# Altium PCB Transceiver.PcbDoc (part 2 of 2)
Units mm, origin at the board's own origin, x right, y up, seen from the top; angles counter-clockwise.
Board outline 140 x 70 mm, 2 copper layers (Top Layer, Bottom Layer); 116 components, 126 nets, 485 pads, 156 vias.
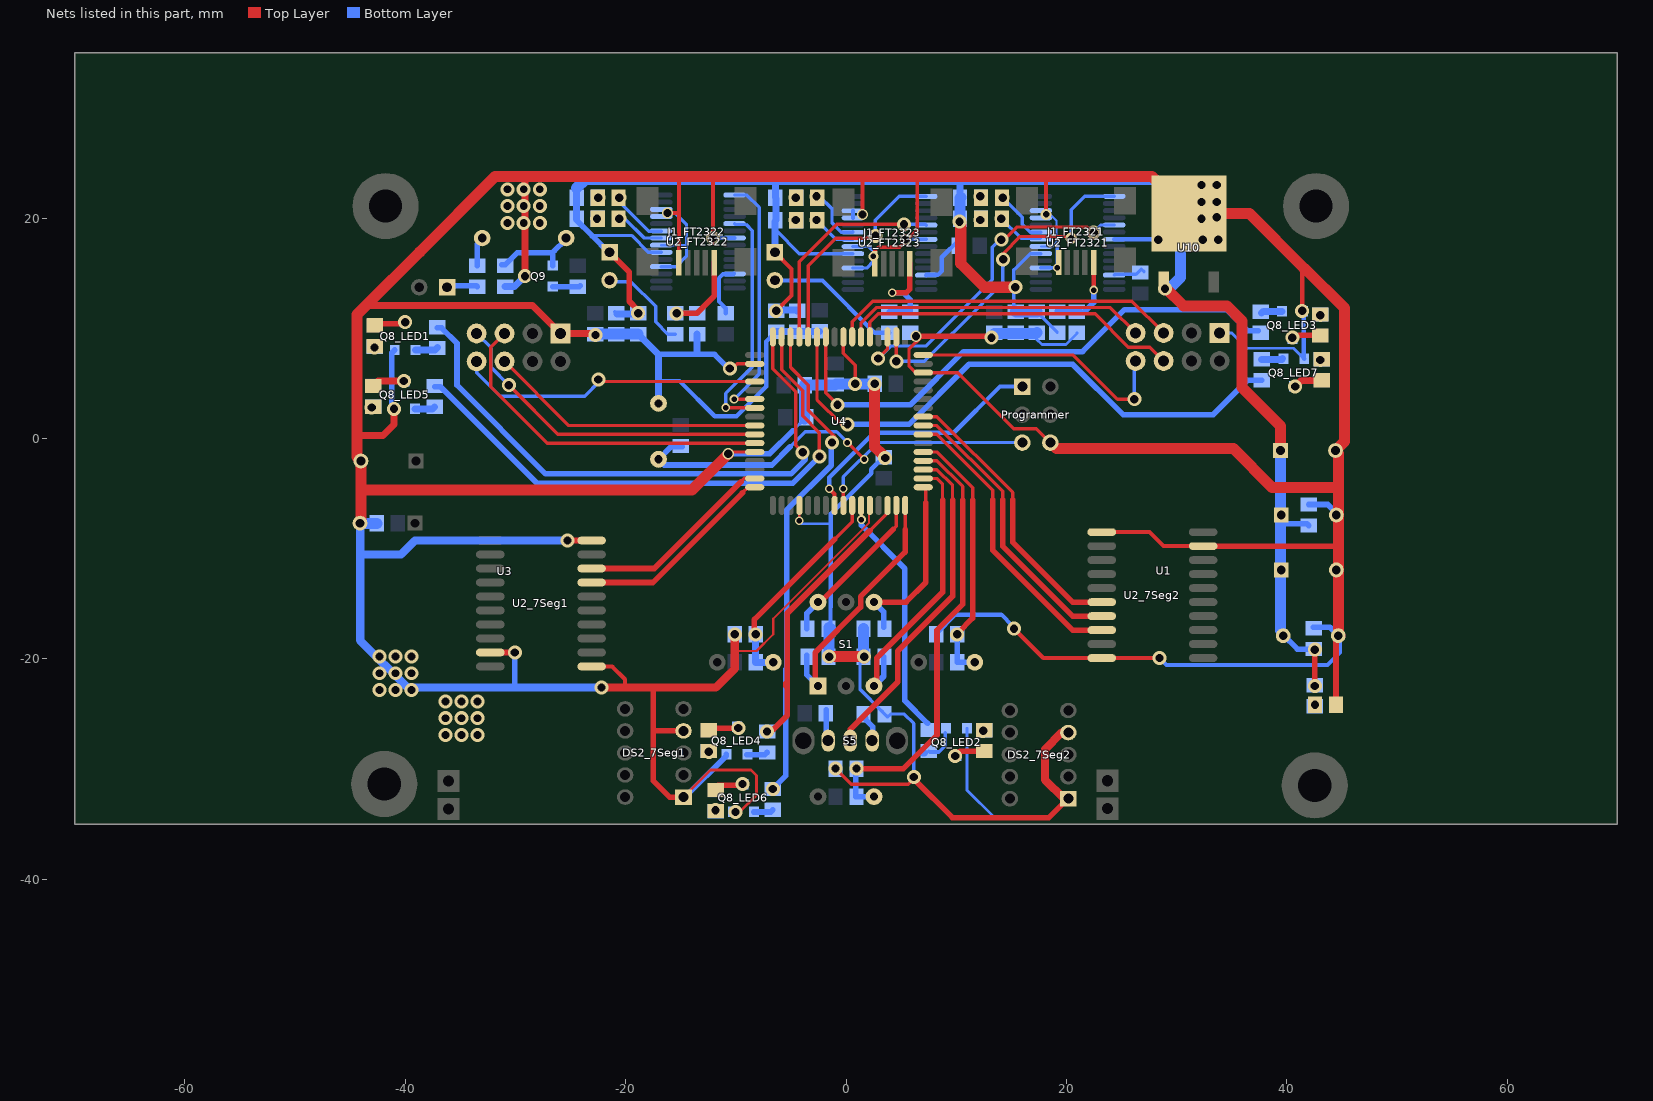
[diagram p2: the nets of this part, all layers, seen from the top]

## Via types
v1: diameter 1.27, hole 0.75, Top Layer to Bottom Layer, 103 vias
v2: diameter 1.27, hole 0.711, Top Layer to Bottom Layer, 27 vias
v3: diameter 0.8, hole 0.5, Top Layer to Bottom Layer, 14 vias
v4: diameter 1.016, hole 0.75, Top Layer to Bottom Layer, 5 vias
v5: diameter 0.762, hole 0.5, Top Layer to Bottom Layer, 2 vias
v6: diameter 1.016, hole 0.6, Top Layer to Bottom Layer, 2 vias
v7: diameter 0.85, hole 0.5, Top Layer to Bottom Layer, 1 vias
v8: diameter 1.27, hole 0.8, Top Layer to Bottom Layer, 1 vias
v9: diameter 0.889, hole 0.5, Top Layer to Bottom Layer, 1 vias

## Nets (pads, with @x,y where several pads share a name; then routed paths per layer and width w, separated by ;. In a path a pad name is that pad's centre, name@x,y a point inside that pad or via, vN(x,y) a via of type N, cw(c..) or ccw(c..) an arc to the next point about the centre after c; other vN are vias at no path point) (continued)
E2: U2_7Seg2.6 U4.9 | length 25.8
  Top Layer w0.3: U4.9@7.015,1.965 8.255,1.965 15.131,-4.911 15.131,-5.59
  Top Layer w0.5: 15.131,-5.59 15.131,-9.416 20.574,-14.859 U2_7Seg2.6@23.213,-14.859
F1: U2_7Seg1.8 U4.47 | length 18.3
  Top Layer w0.305: -9.525,-3.937 -9.223,-3.635 U4.47@-8.285,-3.635
  Top Layer w0.508: U2_7Seg1.8@-23.241,-11.811 U2_7Seg1.8@-23.086,-11.811 -17.399,-11.811 -9.525,-3.937
F2: U2_7Seg2.8 U4.7 | length 26.7
  Top Layer w0.3: U4.7@7.015,0.365 8.255,0.365 13.312,-4.692
  Top Layer w0.305: 13.312,-5.588 13.312,-4.692
  Top Layer w0.5: 13.312,-5.588 13.312,-10.137 20.574,-17.399 U2_7Seg2.8@23.213,-17.399
G1: U2_7Seg1.7 U4.48 | length 18.7
  Top Layer w0.305: -9.398,-4.953 -8.88,-4.435 U4.48@-8.285,-4.435
  Top Layer w0.508: U2_7Seg1.7@-23.368,-13.081 U2_7Seg1.7@-23.086,-13.081 -17.526,-13.081 -9.398,-4.953
G2: U2_7Seg2.7 U4.8 | length 26.3
  Top Layer w0.3: U4.8@7.015,1.165 8.255,1.165 14.222,-4.802 14.222,-5.59
  Top Layer w0.5: 14.222,-5.59 14.222,-9.777 20.574,-16.129 U2_7Seg2.7@23.213,-16.129
GND: C1_FT2321.1 C1_FT2322.1 C1_FT2323.1 C2_FT2321.1 C2_FT2322.1 C2_FT2323.1 C3_FT2321.2 C3_FT2322.2 C3_FT2323.2 C4_FT2321.1 C4_FT2322.1 C4_FT2323.1 C7.2 C9.2 C10.1 C11.2 C12.1 C13.2 C14.1 C15.2 C16.2 C17.1 C18.1 C19.1 C20.1 C21.1 C22.2 D4.2 DS2_7Seg1.1 DS2_7Seg1.4 DS2_7Seg2.1 DS2_7Seg2.4 J1_FT2321.5 J1_FT2322.5 J1_FT2323.5 Programmer.6 Q8_LED1.3 Q8_LED2.3 Q8_LED3.3 Q8_LED4.3 Q8_LED5.3 Q8_LED6.3 Q8_LED7.3 Q9.3 R8.1 R9.1 R10.1 R11.1 R12.1 R16.1 R17.1 R18.2 Reset1.1 U1.1 U2_7Seg1.1 U2_7Seg1.10 U2_7Seg1.19 U2_7Seg2.1 U2_7Seg2.10 U2_7Seg2.19 U2_FT2321.7 U2_FT2321.18 U2_FT2321.21 U2_FT2321.25 U2_FT2321.26 U2_FT2322.7 U2_FT2322.18 U2_FT2322.21 U2_FT2322.25 U2_FT2322.26 U2_FT2323.7 U2_FT2323.18 U2_FT2323.21 U2_FT2323.25 U2_FT2323.26 U3.1 U4.14 U4.24 U4.34 U4.44 U4.52 U4.60 U10.4 | length 746
  Top Layer w0.203: -10.033,-19.304 -8.128,-19.304 -6.604,-17.78 -6.604,-16.359 2.099,-7.657 2.099,-6.151 U4.60@2.165,-6.085
  Top Layer w0.254: DS2_7Seg1.1@-14.749,-32.555 -12.293,-30.099 -8.636,-30.099 -8.128,-30.607 -8.128,-32.385 -9.652,-33.909 v1(-10.033,-33.909) ; v5@-4.289,-7.464 -4.235,-7.41 U4.52@-4.235,-6.085
  Top Layer w0.305: v4@-10.563,-1.235 U4.44@-8.285,-1.235 ; v1@-10.287,6.35 -9.872,6.765 U4.34@-8.285,6.765 ; v1(-0.95,-29.972) 0.476,-31.398 5.639,-31.398 v1@6.136,-30.901 ; U4.24@-0.235,9.215 -0.235,7.728 0.835,6.658 v1(0.835,4.953) ; 2.608,17.017 2.943,17.353 3.426,17.353 3.429,17.356 4.88,17.356 6.477,18.953 6.477,23.629 6.604,23.756 ; U4.14@6.858,5.969 6.324,5.969 5.715,6.578 5.715,8.078 6.908,9.271 ; U4.14@7.015,5.965 10.164,5.965 15.24,0.889 17.272,0.889 Programmer.6@18.542,-0.381
  Top Layer w0.381: U2_7Seg1.1@-23.086,-20.701 -21.224,-20.701 -20.066,-21.859 -20.066,-22.614 ; v4(-16.198,20.447) -15.16,20.447 ; J1_FT2322.5@-15.16,15.942 -15.16,20.447 ; -15.031,23.756 -15.16,23.627 -15.16,20.447 ; v1(-12.065,18.185) -12.065,23.582 -11.891,23.756 ; v4(1.494,20.32) 1.494,23.756 ; v1@15.176,-17.209 17.907,-19.939 U2_7Seg2.10@23.213,-19.939 v1(28.448,-19.939) ; v6(18.161,20.329) 18.161,23.495 ; U2_7Seg2.1@23.213,-8.509 27.541,-8.509 28.811,-9.779 U2_7Seg2.19@32.413,-9.779 ; v1(41.402,11.571) 41.402,15.221 41.62,15.439
  Top Layer w0.5: 6.908,9.271 13.081,9.271 v1(13.208,9.144) ; U2_7Seg2.19@32.413,-9.779 44.626,-9.779 44.68,-9.833
  Top Layer w0.508: U2_7Seg1.19@-32.286,-19.431 v1(-30.054,-19.431) ; v1(-25.268,-9.271) U2_7Seg1.10@-23.086,-9.271 ; -17.632,-22.614 -17.477,-22.769 -17.477,-26.487 ; DS2_7Seg1.1@-14.749,-32.555 -16.012,-32.555 -17.477,-31.09 -17.477,-26.487 ; DS2_7Seg1.4@-14.749,-26.555 -17.409,-26.555 -17.477,-26.487 ; v1@6.223,-30.988 9.652,-34.417 18.415,-34.417 19.773,-33.059 DS2_7Seg2.1@19.773,-32.702 ; D4.2@44.474,-24.166 44.474,-18.137 C15.2@44.704,-17.907
  Top Layer w0.635: -44.388,0.254 -42.037,0.254 -41.018,1.273 v1(-41.018,2.687) ; -43.546,12.065 -28.448,12.065 U3.1@-25.908,9.525 -22.872,9.525 v1(-22.733,9.386) ; v1(-29.133,14.724) -29.133,23.64 -29.018,23.756
  Top Layer w0.75: v1@-22.284,-22.606 -22.276,-22.614 -20.066,-22.614 -17.632,-22.614 -11.811,-22.614 -10.094,-20.897 v1(-10.094,-17.78) ; DS2_7Seg2.1@19.773,-32.702 18.058,-30.987 18.058,-28.22 19.576,-26.702 DS2_7Seg2.4@20.12,-26.702
  Top Layer w1: C13.2@-44.106,-7.698 -44.029,-7.622 C16.2@-44.029,-2.056 -44.388,-1.697 -44.388,0.254 -44.388,11.223 -43.546,12.065 -38.687,16.924 -31.855,23.756 -29.018,23.756 -15.031,23.756 -11.891,23.756 1.494,23.756 6.604,23.756 27.755,23.756 U10.4@31.115,20.395 36.628,20.395 41.584,15.439 41.62,15.439 45.225,11.834 45.225,-0.297 C7.2@44.423,-1.099 44.68,-1.356 44.68,-4.572 ; -43.942,-4.699 -13.986,-4.699 v4(-10.684,-1.397) ; v8(-1.524,-19.812) 1.524,-19.812 v1@1.651,-19.939 ; 2.601,-0.762 v1@3.302,-1.463 ; 2.606,-0.762 v1(2.606,4.953) ; Programmer.6@18.542,-0.383 19.085,-0.926 35.153,-0.926 38.672,-4.445 44.553,-4.445 44.68,-4.572 ; C15.2@44.68,-17.756 44.68,-9.833 44.68,-4.572 ; C15.2@44.756,-17.832 C15.2@44.831,-17.907
  Bottom Layer w0.203: U2_FT2321.21@17.69,17.421 18.745,17.421 19.104,17.78 19.104,19.758 18.542,20.32 v6@18.415,20.32
  Bottom Layer w0.254: U2_FT2322.21@-16.765,17.535 -14.487,17.535 -14.478,17.526 ; -4.822,0.705 C18.1@-3.749,1.778 ; v5(-4.26,-7.493) -4.006,-7.747 -1.397,-7.747 ; Q8_LED2.3@10.983,-26.309 10.983,-31.938 13.462,-34.417 18.415,-34.417 DS2_7Seg2.1@19.939,-32.893 ; C3_FT2321.2@17.272,9.525 17.272,9.017 17.78,8.509 19.957,8.509 20.955,9.507 C4_FT2321.1@20.955,9.591 ; U1.1@33.909,9.565 35.012,9.565 36.395,8.182 40.627,8.182 Q8_LED7.3@41.538,7.27
  Bottom Layer w0.305: U2_FT2322.18@-16.765,15.585 -15.403,15.585 -14.478,16.51 -14.478,17.526 -14.478,19.431 -15.494,20.447 v4(-16.198,20.447) v4@-16.256,20.447 ; U2_FT2323.18@0.628,15.458 1.869,15.458 v9@2.54,16.129 ; U2_FT2323.21@0.628,17.408 1.903,17.408 1.905,17.41 2.072,17.41 v9@2.591,16.891 ; R10.1@1.59,-19.812 1.27,-20.132 1.27,-22.785 R18.2@3.25,-24.765 ; R18.2@3.302,-24.765 R18.2@3.25,-24.765 ; v4@5.582,18.058 U2_FT2323.7@7.278,18.058 ; v1(6.16,-30.734) 6.16,-25.878 5.302,-25.019 4.057,-25.019 3.803,-25.273 3.758,-25.273 R18.2@3.25,-24.765 ; U2_FT2321.18@17.69,15.471 19.154,15.471 v5(19.177,15.494) 19.177,17.707 ccw(c19.104,17.707) 19.104,17.78
  Bottom Layer w0.381: -17.018,5.207 -15.113,5.207 -11.909,2.003 -9.935,2.003 -7.239,4.699 -7.239,8.78 C2_FT2323.1@-6.342,9.677 cw(c-6.301,9.677) C2_FT2323.1@-6.301,9.718 ; v1(-12.065,18.185) U2_FT2322.7@-10.115,18.185 ; R11.1@-1.59,-17.272 -1.397,-17.079 -1.397,-15.346 -1.388,-15.336 -1.388,-6.849 2.288,-3.173 2.288,-2.805 3.316,-1.778 v1(3.556,-1.778) ; U2_FT2323.25@0.628,20.008 U2_FT2323.26@0.628,20.658 ; R17.1@8.194,-17.78 8.194,-17.728 9.92,-16.002 14.097,-16.002 15.113,-17.018 v1@15.113,-17.272 ; U2_FT2321.7@24.34,18.071 28.01,18.071 v1@28.194,17.887 ; v1(28.448,-19.939) 29.083,-20.574 43.688,-20.574 44.831,-19.431 44.831,-18.415 C15.2@44.577,-18.161 ; Q8_LED3.3@41.538,11.461 41.538,7.27 Q8_LED7.3@41.59,7.219
  Bottom Layer w0.5: v4(-10.684,-1.397) -6.924,-1.397 -4.822,0.705
  Bottom Layer w0.508: v1(-41.018,2.687) -41.221,2.89 -41.221,7.755 Q8_LED1.3@-40.955,8.021 ; -30.099,-22.606 -30.054,-22.561 v1(-30.054,-19.431) ; -17.018,7.62 -11.938,7.62 v1@-10.541,6.223 ; DS2_7Seg1.1@-14.749,-32.555 -14.608,-32.555 -10.856,-28.803 Q8_LED4.3@-10.856,-28.682 ; C10.1@42.002,-6.005 43.724,-6.005 C9.2@44.577,-6.858 ; C12.1@42.418,-17.145 43.918,-17.145 C15.2@44.68,-17.907
  Bottom Layer w0.635: C22.2@-30.931,13.774 -30.083,13.774 v1(-29.133,14.724) ; C3_FT2322.2@-18.861,9.464 -17.018,7.621 -17.018,7.62 -17.018,5.207 Reset1.1@-17.018,3.175 ; -13.503,7.706 C4_FT2322.1@-13.503,9.464 ; v1(-10.541,6.35) v1@-10.541,6.502 ; C2_FT2323.1@-6.301,9.718 C1_FT2323.1@-2.384,9.718
  Bottom Layer w0.75: C13.2@-44.093,-7.711 -44.093,-10.541 ; v1(-25.268,-9.271) -39.127,-9.271 -40.397,-10.541 -44.093,-10.541 ; v1(-22.198,-22.606) -30.099,-22.606 -39.82,-22.606 -44.093,-18.333 -44.093,-10.541
  Bottom Layer w1: C13.2@-44.093,-7.711 C14.1@-42.581,-7.711 ; C1_FT2322.1@-22.777,9.464 C2_FT2322.1@-20.841,9.464 C3_FT2322.2@-18.861,9.464 ; C18.1@-3.749,1.778 C21.1@-3.749,4.826 -1.018,4.826 C19.1@-0.952,4.892 -0.891,4.953 v1(0.835,4.953) v1(2.606,4.953) ; R8.1@-1.397,-19.812 -1.524,-19.939 v8(-1.524,-19.812) -1.524,-17.145 R11.1@-1.397,-17.272 ; R10.1@1.59,-19.812 R9.1@1.59,-17.272 ; C1_FT2321.1@13.462,9.525 17.249,9.525 C3_FT2321.2@17.315,9.591
  other v1: 1.651,-19.812 15.24,-17.272 28.341,18.034 32.385,18.034 33.782,18.034 32.258,19.939 33.655,20.066 32.258,21.463 33.655,21.463 32.258,22.987 33.655,22.987
  other v2: -36.352,-26.924 -34.892,-26.924 -33.431,-26.924 -36.352,-25.4 -34.892,-25.4 -33.431,-25.4 -36.352,-23.876 -34.892,-23.876 -33.431,-23.876 -42.355,-22.842 -40.894,-22.842 -39.433,-22.842 -42.355,-21.318 -40.894,-21.318 -39.433,-21.318 -42.355,-19.794 -40.894,-19.794 -39.433,-19.794 -30.709,19.558 -29.249,19.558 -27.788,19.558 -30.709,21.082 -29.249,21.082 -27.788,21.082 -30.709,22.606 -29.249,22.606 -27.788,22.606
  other v4: 6.35,9.271 5.387,18.058
  other v9: 2.493,16.51
ID0: R8.2 S1.1 U4.64 | length 23
  Top Layer w0.305: 5.365,-8.271 U4.64@5.365,-6.085
  Top Layer w0.508: S1.1@-2.667,-22.479 -2.794,-22.352 -2.794,-19.431 1.324,-15.313 1.324,-14.355 5.365,-10.314 5.365,-8.271
  Bottom Layer w0.508: R8.2@-3.556,-19.685 -3.556,-21.463 S1.1@-2.54,-22.479
ID1: R9.2 S1.4 U4.1 | length 16.8
  Top Layer w0.305: U4.1@7.015,-4.435 7.239,-4.659 7.239,-5.842
  Top Layer w0.508: S1.4@2.54,-14.859 5.461,-14.859 7.239,-13.081 7.239,-5.842
  Bottom Layer w0.508: S1.4@2.54,-14.859 3.429,-15.748 R9.2@3.429,-17.145
ID2: R10.2 S1.3 U4.2 | length 25.9
  Top Layer w0.3: U4.2@7.015,-3.635 8.255,-3.635 8.763,-4.143 8.763,-5.59
  Top Layer w0.508: S1.3@2.54,-22.479 2.794,-22.225 2.794,-19.939 8.763,-13.97 8.763,-5.59
  Bottom Layer w0.508: S1.3@2.54,-22.479 3.429,-21.59 R10.2@3.429,-19.812
ID3: R11.2 S1.6 U4.63 | length 14.7
  Top Layer w0.305: 4.271,-8.255 4.565,-7.961 U4.63@4.565,-6.085
  Top Layer w0.508: S1.6@-2.54,-14.986 -2.46,-14.986 4.271,-8.255
  Bottom Layer w0.508: R11.2@-3.556,-17.272 -3.556,-15.875 S1.6@-2.54,-14.859
IRQ1: U1.8 U4.16 | length 24.3
  Top Layer w0.305: U4.16@7.015,7.565 20.629,7.565 24.638,3.556 v1@25.908,3.556 ; v1@26.035,3.683 v1@26.162,3.81
  Bottom Layer w0.305: v1(26.162,3.556) 26.162,6.898 U1.8@26.289,7.025
IRQ2: U3.8 U4.36 | length 27.8
  Top Layer w0.305: v1@-22.479,5.165 U4.36@-8.285,5.165
  Bottom Layer w0.305: U3.8@-33.528,6.985 -33.528,5.969 -31.398,3.839 -23.72,3.839 v1@-22.352,5.207
  other v1: -22.479,5.334
K0: C5.1 R16.2 S3.1 U4.58 | length 19.4
  Top Layer w0.305: -1.016,-9.144 0.565,-7.563 U4.58@0.565,-6.085
  Top Layer w0.508: v1@-8.309,-17.599 -8.309,-16.437 -1.016,-9.144 ; v1@-8.161,-17.747 v1@-8.128,-17.78
  Bottom Layer w0.635: R16.2@-8.194,-17.841 C5.1@-8.194,-20.32 -6.731,-20.32 S3.1@-6.604,-20.447
  other v1: -8.194,-17.78
K1: C8.1 R12.2 S2.1 U4.4 | length 40.9
  Top Layer w0.3: U4.4@7.015,-2.035 8.255,-2.035 10.583,-4.362 10.583,-5.59
  Top Layer w0.508: v1@0.889,-29.972 v1(0.95,-29.972) 5.207,-29.972 8.255,-26.924 8.255,-17.399 10.583,-15.071 10.583,-5.59
  Bottom Layer w0.508: R12.2@0.889,-29.972 0.889,-32.512 C8.1@0.95,-32.512 S2.1@2.54,-32.512
K2: C6.1 R17.2 S4.1 U4.5 | length 23.5
  Top Layer w0.3: U4.5@7.015,-1.235 8.255,-1.235 11.492,-4.472 11.492,-5.59
  Top Layer w0.508: v1@10.16,-17.653 11.492,-16.321 11.492,-5.59
  Bottom Layer w0.508: R17.2@10.094,-17.841 C6.1@10.094,-20.32 S4.1@11.557,-20.32
  other v1: 10.094,-17.78
K3: S5.2 U4.3 | length 30.4
  Top Layer w0.3: U4.3@7.015,-2.835 8.255,-2.835 9.673,-4.253 9.673,-5.59
  Top Layer w0.508: S5.2@0.381,-27.559 0.381,-26.416 4.699,-22.098 4.699,-19.304 9.673,-14.33 9.673,-5.59
LED1: R13_LED1.1 U4.32 | length 54
  Top Layer w0.305: U4.32@-6.635,9.215 -6.635,6.302 -4.572,4.239 -4.572,-0.635 v1(-3.937,-1.27)
  Bottom Layer w0.508: R13_LED1.1@-37.084,10.033 -36.703,10.033 -35.306,8.636 -35.306,4.826 -27.26,-3.22 -4.998,-3.22 -3.683,-1.905 -3.683,-1.524 v1(-3.937,-1.27)
LED2: R13_LED2.1 U4.59 | length 22.4
  Top Layer w0.254: U4.59@1.365,-5.958 v3(1.397,-7.366)
  Bottom Layer w0.508: v3(1.397,-7.366) 1.397,-7.874 5.334,-11.811 5.334,-23.802 R13_LED2.1@7.403,-25.871
LED3: R13_LED3.1 U4.26 | length 49.1
  Top Layer w0.305: U4.26@-1.835,9.215 -1.835,4.121 v1(-0.762,3.048)
  Bottom Layer w0.508: v1(-0.762,3.048) 5.842,3.048 10.668,7.874 21.463,7.874 25.273,11.684 34.544,11.684 36.449,9.779 R13_LED3.1@37.404,9.779
LED4: R13_LED4.1 U4.62 | length 25.3
  Top Layer w0.3: 2.286,-8.382 2.286,-8.255 3.81,-6.731 3.81,-6.13 U4.62@3.765,-6.085
  Top Layer w0.508: v1@-6.921,-26.733 -5.334,-25.146 -5.334,-15.875 2.159,-8.382 ; -5.461,-22.479 -5.461,-22.225
  other v1: -7.168,-26.609
LED5: R13_LED5.1 U4.31 | length 51.8
  Top Layer w0.305: U4.31@-5.835,9.215 -5.835,6.216 -3.937,4.318 -3.937,2.032 -2.413,0.508 v1(-2.413,-1.651)
  Bottom Layer w0.508: R13_LED5.1@-37.338,4.699 -36.83,4.699 -28.067,-4.064 -4.826,-4.064 v1(-2.413,-1.651)
LED6: R13_LED6.1 U4.30 | length 45.4
  Top Layer w0.305: U4.30@-5.035,9.215 -5.035,6.432 -3.429,4.826 -3.429,2.54 -1.016,0.127 -1.016,-0.254 v1@-1.143,-0.381
  Bottom Layer w0.508: R13_LED6.1@-6.731,-31.877 -5.461,-30.607 -5.461,-20.97 -5.388,-20.897 -5.388,-6.509 -1.324,-2.445 -1.324,-0.454 v1@-1.397,-0.381 ; v1(-1.27,-0.381) -1.206,-0.318 -1.143,-0.381 v1(-1.27,-0.381)
  other v1: -6.64,-31.816
LED7: R13_LED7.1 U4.27 | length 52.4
  Top Layer w0.305: U4.27@-2.635,9.215 -2.635,3.524 -0.381,1.27 v1(0.127,1.27)
  Bottom Layer w0.508: v1(0.127,1.27) 5.715,1.27 11.176,6.731 20.574,6.731 25.146,2.159 33.335,2.159 36.449,5.273 R13_LED7.1@37.719,5.273
MISO1: U1.7 U4.22 | length 27.7
  Top Layer w0.305: U4.22@1.365,9.215 1.365,10.509 2.73,11.874 23.979,11.874 U1.7@26.289,9.565
MISO2: U3.7 U4.42 | length 29.8
  Top Layer w0.305: v1@-30.353,4.572 -26.146,0.365 U4.42@-8.285,0.365
  Bottom Layer w0.305: U3.7@-33.401,9.652 -33.401,9.398 -32.258,8.255 -32.258,6.477 v1(-30.607,4.826)
MOSI1: U1.6 U4.21 | length 30.1
  Top Layer w0.305: U4.21@2.165,9.215 2.165,10.547 2.921,11.303 22.606,11.303 25.632,8.277 27.577,8.277 U1.6@28.829,7.025
MOSI2: U3.6 U4.41 | length 25.1
  Top Layer w0.305: U3.6@-30.988,6.985 -25.168,1.165 U4.41@-8.285,1.165
NetC4_FT2321_2: C4_FT2321.2 FB1_FT2321.2 J1_FT2321.1 | length 6.7
  Top Layer w0.381: v3@22.479,13.716 22.488,13.725 J1_FT2321.1@22.488,15.955
  Bottom Layer w0.508: FB1_FT2321.2@19.177,11.557 19.243,11.491 19.295,11.491 C4_FT2321.2@21.209,11.491 ; C4_FT2321.2@21.082,11.557 C4_FT2321.2@21.209,11.684 ; 21.717,11.557 22.479,12.319 v3(22.479,13.462)
NetC4_FT2322_2: C4_FT2322.2 FB1_FT2322.2 J1_FT2322.1 | length 9.1
  Top Layer w0.508: v1(-15.367,11.353) -13.539,11.353 -11.96,12.932 J1_FT2322.1@-11.96,15.942
  Bottom Layer w0.508: FB1_FT2322.2@-15.494,11.353 v1(-15.367,11.353) -13.514,11.353 C4_FT2322.2@-13.503,11.364
NetC4_FT2323_2: C4_FT2323.2 FB1_FT2323.2 J1_FT2323.1 | length 9
  Top Layer w0.5: v3(4.191,13.208) 5.461,13.208 5.807,13.554 J1_FT2323.1@5.807,15.85
  Bottom Layer w0.5: FB1_FT2323.2@3.937,11.491 C4_FT2323.2@5.842,11.491 5.842,12.573 5.207,13.208 v3(4.191,13.208)
NetC22_1: C22.1 LS1.1 Q9.1 | length 8.4
  Bottom Layer w0.5: C22.1@-31.242,15.748 -30.931,15.748 -29.829,16.851 -26.633,16.851 ; Q9.1@-26.633,15.674 -26.633,16.851 ; -26.416,17.068 -26.633,16.851 ; LS1.1@-25.331,18.153 -26.633,16.851
NetD1_FT2321_1: D1_FT2321.1 R1_FT2321.1
  other v1: 12.192,21.971
NetD1_FT2321_2: D1_FT2321.2 U2_FT2321.23 | length 5.1
  Bottom Layer w0.305: v1(14.224,21.844) 16.002,20.066 16.002,19.431 16.712,18.721 U2_FT2321.23@17.69,18.721
NetD1_FT2322_1: D1_FT2322.1 R1_FT2322.1
  other v1: -22.479,21.844
NetD1_FT2322_2: D1_FT2322.2 U2_FT2322.23 | length 5.4
  Bottom Layer w0.305: v1(-20.574,21.844) -20.447,21.717 -20.447,21.336 -17.907,18.796 U2_FT2322.23@-16.764,18.796 ; v1@-20.574,21.971 v1@-20.511,21.907
NetD1_FT2323_1: D1_FT2323.1 R1_FT2323.1
  other v1: -4.572,21.844
NetD1_FT2323_2: D1_FT2323.2 U2_FT2323.23 | length 5.4
  Bottom Layer w0.305: v1(-2.667,21.971) -2.413,21.971 -1.27,20.828 -1.27,19.558 -0.42,18.708 U2_FT2323.23@0.628,18.708 ; U2_FT2323.23@0.628,18.781 U2_FT2323.23@0.635,18.781
NetD2_FT2321_1: D2_FT2321.1 R2_FT2321.1
  other v1: 12.192,19.812
NetD2_FT2321_2: D2_FT2321.2 U2_FT2321.22 | length 4.3
  Bottom Layer w0.305: v1(14.097,19.939) 15.893,18.143 U2_FT2321.22@17.653,18.143
NetD2_FT2322_1: D2_FT2322.1 R2_FT2322.1
  other v1: -22.606,19.939
NetD2_FT2322_2: D2_FT2322.2 U2_FT2322.22 | length 4.5
  Bottom Layer w0.305: v1(-20.574,19.939) -20.066,19.939 -18.312,18.185 U2_FT2322.22@-16.765,18.185
NetD2_FT2323_1: D2_FT2323.1 R2_FT2323.1
  other v1: -4.572,19.812
NetD2_FT2323_2: D2_FT2323.2 U2_FT2323.22 | length 4
  Bottom Layer w0.305: v1(-2.667,19.812) -0.913,18.058 U2_FT2323.22@0.628,18.058
NetD3_LED1_1: D3_LED1.1 R14_LED1.1
  other v1: -42.799,8.255
NetD3_LED1_2: D3_LED1.2 Q8_LED1.1 | length 2.9
  Top Layer w0.5: D3_LED1.2@-42.769,10.125 -42.48,10.414 -40.132,10.414 v1(-40.005,10.541)
NetD3_LED2_1: D3_LED2.1 R14_LED2.1
  other v1: 12.446,-26.543
NetD3_LED2_2: D3_LED2.2 Q8_LED2.1 | length 2.8
  Top Layer w0.5: v1(9.906,-28.829) 10.353,-28.382 D3_LED2.2@12.545,-28.382
NetD3_LED3_1: D3_LED3.1 R14_LED3.1
  other v1: 43.053,11.181
NetD3_LED3_2: D3_LED3.2 Q8_LED3.1 | length 2.2
  Top Layer w0.5: v1@41.087,9.337 D3_LED3.2@43.307,9.337
  other v1: 40.513,9.144
NetD3_LED4_1: D3_LED4.1 R14_LED4.1
  other v1: -12.446,-28.448
NetD3_LED4_2: D3_LED4.2 Q8_LED4.1 | length 2.9
  Top Layer w0.5: D3_LED4.2@-12.573,-26.543 -12.319,-26.289 v1(-9.779,-26.289)
NetD3_LED5_1: D3_LED5.1 R14_LED5.1
  other v1: -43.053,2.794
NetD3_LED5_2: D3_LED5.2 Q8_LED5.1 | length 3.1
  Top Layer w0.635: D3_LED5.2@-42.926,4.76 -42.479,5.207 v1(-40.132,5.207) v1@-40.005,5.207
NetD3_LED6_1: D3_LED6.1 R14_LED6.1
  other v1: -11.841,-33.752
NetD3_LED6_2: D3_LED6.2 Q8_LED6.1 | length 2.7
  Top Layer w0.508: D3_LED6.2@-11.841,-31.913 D3_LED6.2@-11.521,-31.593 ; D3_LED6.2@-11.618,-31.496 v1@-9.398,-31.496
  other v1: -9.398,-31.369
NetD3_LED7_1: D3_LED7.1 R14_LED7.1
  other v1: 43.053,7.117
NetD3_LED7_2: D3_LED7.2 Q8_LED7.1 | length 2.9
  Top Layer w0.635: v1(40.767,4.699) 41.341,5.273 D3_LED7.2@43.434,5.273
NetD4_1: D4.1 R15.2
  other v1: 42.574,-24.166
NetFB1_FT2321_1: 
NetFB1_FT2322_1: FB1_FT2322.1 JP1_FT2322.2 | length 8.8
  Bottom Layer w0.305: JP1_FT2322.2@-21.463,14.224 -19.516,14.224 -17.272,11.98 -17.272,10.565 -16.159,9.453 FB1_FT2322.1@-15.494,9.453
NetFB1_FT2323_1: FB1_FT2323.1 JP1_FT2323.2 | length 12.5
  Bottom Layer w0.381: JP1_FT2323.2@-6.402,13.843 -5.922,14.323 -2.131,14.323 2.601,9.591 FB1_FT2323.1@3.937,9.591
NetJP2_1: JP2.1 R6.2 | length 2.6
  Bottom Layer w0.508: JP2.1@-36.068,13.843 -33.54,13.843 R6.2@-33.471,13.774
NetLS1_2: LS1.2 R6.1 | length 2.7
  Bottom Layer w0.5: R6.1@-33.471,15.674 -33.471,17.598 LS1.2@-32.908,18.161
NetProgrammer_1: Programmer.1 U4.56 | length 23.7
  Top Layer w0.381: v3(-1.524,-4.572) -1.035,-5.061 U4.56@-1.035,-6.085
  Bottom Layer w0.381: v3(-1.524,-4.572) -1.524,-3.556 2.54,0.508 9.779,0.508 13.968,4.697 Programmer.1@16.002,4.697
NetProgrammer_5: Programmer.5 R7.2 Reset1.2 U4.57 | length 43.7
  Top Layer w0.305: U4.57@-0.254,-5.715 v3(-0.254,-4.572) ; v3@0.253,-0.508 v3(1.65,-1.905)
  Bottom Layer w0.305: -5.08,-0.762 -3.712,0.606 -0.861,0.606 0.253,-0.508 v3@0.381,-0.508 ; v3(-0.254,-4.572) -0.254,-3.502 2.867,-0.381 16,-0.381 Programmer.5@16.002,-0.383
  Bottom Layer w0.508: R7.2@-14.859,-0.762 -15.875,-0.762 Reset1.2@-17.018,-1.905 -16.51,-2.413 -6.731,-2.413 -5.08,-0.762
  other v3: 0.127,-0.381
NetQ8_LED1_2: Q8_LED1.2 R13_LED1.2 | length 2.1
  Bottom Layer w0.635: Q8_LED1.2@-39.055,8.021 -37.318,8.021 R13_LED1.2@-37.084,8.255
NetQ8_LED2_2: Q8_LED2.2 R13_LED2.2 | length 4
  Bottom Layer w0.305: R13_LED2.2@7.493,-28.371 7.57,-28.448 R13_LED2.2@7.598,-28.448 ; Q8_LED2.2@9.017,-26.701 9.017,-27.877 8.729,-28.165 8.446,-28.448 ; R13_LED2.2@7.598,-28.448 8.446,-28.448 ; R13_LED2.2@7.598,-28.448 7.662,-28.512 8.382,-28.512 8.446,-28.448
  Bottom Layer w0.635: R13_LED2.2@6.985,-28.575 R13_LED2.2@7.143,-28.575
NetQ8_LED3_2: Q8_LED3.2 R13_LED3.2 | length 1.9
  Bottom Layer w0.635: R13_LED3.2@37.719,11.364 37.892,11.537 Q8_LED3.2@39.563,11.537
NetQ8_LED4_2: Q8_LED4.2 R13_LED4.2 | length 1.9
  Bottom Layer w0.508: Q8_LED4.2@-9.017,-28.702 -7.361,-28.702 R13_LED4.2@-7.168,-28.509
NetQ8_LED5_2: Q8_LED5.2 R13_LED5.2 | length 1.9
  Bottom Layer w0.635: Q8_LED5.2@-39.116,2.667 -37.531,2.667 R13_LED5.2@-37.338,2.86
NetQ8_LED6_2: Q8_LED6.2 R13_LED6.2 | length 1.8
  Bottom Layer w0.508: Q8_LED6.2@-8.382,-33.909 -6.833,-33.909 R13_LED6.2@-6.64,-33.716
NetQ8_LED7_2: Q8_LED7.2 R13_LED7.2 | length 1.9
  Bottom Layer w0.635: R13_LED7.2@37.719,7.173 39.558,7.173 Q8_LED7.2@39.624,7.239
NetQ9_2: Q9.2 R5.1 | length 2.5
  Bottom Layer w0.508: Q9.2@-26.633,13.774 R5.1@-24.327,13.774 -24.199,13.774 R5.1@-24.13,13.843
NetR3_FT2321_1: R3_FT2321.1 U2_FT2321.12 | length 3
  Bottom Layer w0.305: U2_FT2321.12@24.34,14.821 24.412,14.893 26.323,14.893 26.797,15.367 R3_FT2321.1@27.051,15.113
NetR3_FT2322_1: R3_FT2322.1 U2_FT2322.12 | length 5
  Bottom Layer w0.381: R3_FT2322.1@-10.922,11.364 -10.922,11.811 -11.531,12.42 -11.531,14.54 -11.17,14.901 -10.229,14.901 U2_FT2322.12@-10.16,14.97
NetR3_FT2323_1: R3_FT2323.1 U2_FT2323.12 | length 5.1
  Bottom Layer w0.381: U2_FT2323.12@7.278,14.808 7.313,14.843 8.333,14.843 8.694,15.203 8.694,16.441 R3_FT2323.1@10.287,18.034
NetR4_1: R4.1 S5.1 | length 2.9
  Bottom Layer w0.508: R4.1@-1.778,-24.638 -1.778,-27.273 S5.1@-1.619,-27.432
NetR18_1: R18.1 S5.3 | length 2.3
  Bottom Layer w0.508: R18.1@1.778,-25.4 1.778,-25.527 2.413,-26.162 2.413,-27.4 S5.3@2.381,-27.432
RX1: U2_FT2321.5 U4.19 | length 30.4
  Top Layer w0.3: v1(2.921,7.239) 3.765,8.083 U4.19@3.765,9.215 ; v1@14.224,17.907 15.494,19.177 21.917,19.177 v1@22.225,18.869
  Bottom Layer w0.3: v1(2.921,7.239) 4.064,8.382 7.245,8.382 13.274,14.411 13.274,17.338 v1@13.97,18.034 ; v1(22.479,18.677) 23.173,19.371 U2_FT2321.5@24.34,19.371
  other v1: 14.097,18.034
RX2: U2_FT2322.5 U4.39 | length 21.6
  Top Layer w0.305: v3(-10.922,2.794) -8.314,2.794 U4.39@-8.285,2.765
  Bottom Layer w0.305: v3(-10.922,2.794) -10.912,2.804 -10.912,4.074 -8.509,6.477 -8.509,18.846 -9.076,19.413 -10.042,19.413 U2_FT2322.5@-10.115,19.485
RX3: U2_FT2323.5 U4.29 | length 19.2
  Top Layer w0.305: U4.29@-4.235,9.215 -4.235,16.033 -0.843,19.424 v1@4.699,19.424
  Bottom Layer w0.305: v1(5.258,19.431) 7.206,19.431 U2_FT2323.5@7.278,19.358
SCK1: U1.5 U4.23 | length 31.6
  Top Layer w0.305: U4.23@0.565,9.215 0.565,10.598 2.413,12.446 25.948,12.446 U1.5@28.829,9.565
SCK2: U3.5 U4.43 | length 31.4
  Top Layer w0.305: U3.5@-30.988,9.525 -32.24,8.273 -32.24,4.681 -27.124,-0.435 U4.43@-8.285,-0.435
TX1: U2_FT2321.1 U4.18 | length 30.4
  Top Layer w0.305: U4.18@4.565,9.215 v1(4.565,6.992) v1@4.572,6.985 ; v1(14.261,16.256) v1@14.298,16.219 ; v1@14.261,16.761 15.825,18.325 v6@20.283,18.325
  Bottom Layer w0.305: v1(4.565,6.992) 4.565,6.759 4.798,6.992 7.119,6.992 12.36,12.233 12.36,12.269 12.566,12.475 12.602,12.475 14.224,14.097 14.224,15.584 14.261,15.621 ; v6(20.447,18.161) 20.447,20.75 21.668,21.971 U2_FT2321.1@24.34,21.971
TX2: U2_FT2322.1 U4.38 | length 22.9
  Top Layer w0.305: v3(-10.16,3.565) U4.38@-8.285,3.565
  Bottom Layer w0.305: v3(-10.16,3.565) -10.151,3.565 -7.874,5.842 -7.874,20.955 -9.004,22.085 U2_FT2322.1@-10.115,22.085
TX3: U2_FT2323.1 U4.28 | length 21
  Top Layer w0.305: U4.28@-3.435,9.215 -3.435,15.673 -0.947,18.161 v1@2.921,18.161
  Bottom Layer w0.305: v1@3.048,18.288 2.667,18.669 2.667,19.812 4.826,21.971 7.266,21.971 U2_FT2323.1@7.278,21.958
  other v1: 2.667,18.381
VCC: C2_FT2321.2 C2_FT2322.2 C2_FT2323.2 C3_FT2321.1 C3_FT2322.1 C3_FT2323.1 C7.1 C9.1 C10.2 C11.1 C12.2 C15.1 FB1_FT2321.1 JP1_FT2322.1 JP1_FT2323.1 R1_FT2321.2 R1_FT2322.2 R1_FT2323.2 R2_FT2321.2 R2_FT2322.2 R2_FT2323.2 R15.1 U2_FT2321.20 U2_FT2322.20 U2_FT2323.20 U10.1 | length 183
  Top Layer w0.381: JP1_FT2323.1@-6.46,16.891 -4.953,15.384 -4.953,12.966 v1(-6.342,11.577)
  Top Layer w0.508: JP1_FT2322.1@-21.463,16.891 -19.673,15.101 -19.673,12.446 -18.861,11.634 v1(-18.861,11.364) ; v1@42.545,-22.606 v1(42.545,-22.479) v1(42.545,-19.177)
  Top Layer w1: v1(10.302,19.665) 10.414,19.553 10.414,15.875 12.573,13.716 v1(15.367,13.716) ; U10.1@29.017,13.65 30.632,12.034 34.575,12.034 35.941,10.668 35.941,4.611 39.423,1.129 C7.1@39.423,-1.099
  Bottom Layer w0.203: C2_FT2323.2@-6.422,11.577 v1(-6.342,11.577)
  Bottom Layer w0.254: C3_FT2321.1@17.399,11.491 17.399,11.407 19.177,9.629 FB1_FT2321.1@19.177,9.591
  Bottom Layer w0.305: -23.063,18.415 -19.465,18.415 -17.935,16.885 U2_FT2322.20@-16.765,16.885 ; C2_FT2322.2@-20.978,11.501 C2_FT2322.2@-20.841,11.364 ; -6.35,18.871 -4.237,16.758 U2_FT2323.20@0.628,16.758 ; 15.24,15.296 15.24,11.674 C2_FT2321.2@15.423,11.491 ; 15.249,15.296 16.723,16.771 U2_FT2321.20@17.69,16.771
  Bottom Layer w0.508: R2_FT2322.2@-24.445,19.873 -24.445,19.797 -23.063,18.415 -21.539,16.891 JP1_FT2322.1@-21.463,16.891 ; 39.243,-7.747 39.423,-7.747 41.844,-7.747 C10.2@42.002,-7.905 ; C15.1@39.624,-17.78 40.969,-19.125 C12.2@42.435,-19.125
  Bottom Layer w0.635: R2_FT2322.2@-24.445,19.873 R2_FT2322.2@-24.445,19.939 R1_FT2322.2@-24.445,21.844 -24.445,22.708 ; C2_FT2322.2@-20.77,11.303 C3_FT2322.1@-18.575,11.303 ; -6.604,23.495 -6.411,23.302 R1_FT2323.2@-6.411,21.844 -6.35,21.783 -6.35,19.812 -6.46,19.702 JP1_FT2323.1@-6.46,16.891 ; C2_FT2323.2@-6.342,11.643 -4.503,11.643 C3_FT2323.1@-4.437,11.577 ; 10.287,23.495 10.353,23.429 R1_FT2321.2@10.353,21.844 ; R1_FT2321.2@10.414,21.844 R1_FT2321.2@10.414,21.971
  Bottom Layer w1: -24.445,22.708 -23.658,23.495 -6.604,23.495 10.287,23.495 28.064,23.495 30.367,21.192 30.367,14.581 29.375,13.589 v1(28.956,13.589) ; R2_FT2321.2@10.353,19.939 10.353,21.783 cw(c10.414,21.783) R1_FT2321.2@10.414,21.844 ; C2_FT2321.2@15.367,11.557 15.433,11.491 C3_FT2321.1@17.315,11.491 ; C15.1@39.423,-17.441 39.423,-7.747 C7.1@39.423,-1.099
pads on no net: J1_FT2321.4 J1_FT2321.6 J1_FT2321.7 J1_FT2321.8 J1_FT2321.9 J1_FT2322.4 J1_FT2322.6 J1_FT2322.7 J1_FT2322.8 J1_FT2322.9 J1_FT2323.4 J1_FT2323.6 J1_FT2323.7 J1_FT2323.8 J1_FT2323.9 Programmer.3 Programmer.4 S5.0 U1.25 U1.26 U2_FT2321.2 U2_FT2321.3 U2_FT2321.6 U2_FT2321.8 U2_FT2321.9 U2_FT2321.10 U2_FT2321.11 U2_FT2321.13 U2_FT2321.14 U2_FT2321.19 U2_FT2321.24 U2_FT2321.27 U2_FT2321.28 U2_FT2322.2 U2_FT2322.3 U2_FT2322.6 U2_FT2322.8 U2_FT2322.9 U2_FT2322.10 U2_FT2322.11 U2_FT2322.13 U2_FT2322.14 U2_FT2322.19 U2_FT2322.24 U2_FT2322.27 U2_FT2322.28 U2_FT2323.2 U2_FT2323.3 U2_FT2323.6 U2_FT2323.8 U2_FT2323.9 U2_FT2323.10 U2_FT2323.11 U2_FT2323.13 U2_FT2323.14 U2_FT2323.19 U2_FT2323.24 U2_FT2323.27 U2_FT2323.28 U3.25 U3.26

## Polygon pours and split planes (outlines as drawn)
GND on Bottom Layer "Bottom Layer-GND" (hatched 45Degree grid 0.2 track 0.2, remove dead copper, pour order 6): -45.339,24.257 -45.339,-35.306 46.228,-35.306 46.228,24.257 -45.339,24.257
GND on Top Layer "Top Layer-No Net 1" (hatched 45Degree grid 0.2 track 0.2, remove dead copper, pour order 8): -45.212,24.511 -44.958,24.257 45.974,24.257 45.974,-34.925 45.974,-34.798 -45.212,-34.798 -45.212,24.257 -44.958,24.257

## Keep-outs
Keep-Out Layer:
  lines w0.254: -45.339,-35 -45.339,24.583 46.101,24.583 46.101,-35 -45.339,-35

## Other copper
Top Layer:
  pour cut-out: -45.339,17.145 -40.64,17.145 ccw(c-40.64,19.685) -38.1,19.685 -38.1,24.638 cw(c-38.227,24.638) -38.227,24.511 -45.339,24.511
  pour cut-out: 38.735,24.638 38.735,19.939 ccw(c41.275,19.939) 41.275,17.399 46.228,17.399 cw(c46.228,17.526) 46.101,17.526 46.101,24.638
  pour cut-out: 46.101,-27.559 41.402,-27.559 ccw(c41.402,-30.099) 38.862,-30.099 38.862,-35.052 cw(c38.989,-35.052) 38.989,-34.925 46.101,-34.925
  pour cut-out: -37.973,-34.925 -37.973,-30.226 ccw(c-40.513,-30.226) -40.513,-27.686 -45.466,-27.686 cw(c-45.466,-27.813) -45.339,-27.813 -45.339,-34.925
  text "KN2C" at 22.382,-5.461 h3.3
  text "Small Size Team" at 22.479,-6.858 h0.9
  text "Left" at -33.02,-33.02 h1.52
  text "Right" at 27.559,-33.401 h1.52
Bottom Layer:
  pour cut-out: -45.339,17.145 -40.64,17.145 ccw(c-40.64,19.685) -38.1,19.685 -38.1,24.638 cw(c-38.227,24.638) -38.227,24.511 -45.339,24.511
  pour cut-out: 38.735,24.638 38.735,19.939 ccw(c41.275,19.939) 41.275,17.399 46.228,17.399 cw(c46.228,17.526) 46.101,17.526 46.101,24.638
  pour cut-out: 46.101,-27.559 41.402,-27.559 ccw(c41.402,-30.099) 38.862,-30.099 38.862,-35.052 cw(c38.989,-35.052) 38.989,-34.925 46.101,-34.925
  pour cut-out: -37.973,-34.925 -37.973,-30.226 ccw(c-40.513,-30.226) -40.513,-27.686 -45.466,-27.686 cw(c-45.466,-27.813) -45.339,-27.813 -45.339,-34.925